# EAGLE board sch_smd_1206_component_only_component - Copy (EAGLE 8.4.1)

Size 100 x 80 mm. Coordinates in mm from the lower left corner, seen from the top.
Outline: 0,0 100,0 100,80 0,80 0,0
Copper layers (1*16): Top 0.035mm / dielectric 1.5mm / Bottom 0.035mm
Design rules "default": minimum track width 6mil, minimum drill 0.35mm, track to track 6mil, track to pad 6mil, pad to pad 6mil, via to via 6mil, smd to smd 6mil, copper to edge 40mil, drill to drill 6mil, minimum pad ring 10mil, minimum via ring 8mil, stop-mask expansion 4mil, vias tented up to drill 0mil, thermal gap 10mil

## Footprints (pad centres in the part's own frame; a part is rotated, then mirrored left to right if it is on the bottom)
BATTERY = drill 1.016 long: + 9.525,-5.08; +@1 9.525,5.08; - -5.715,0
1X12 = drill 1.016 long: 1 -13.97,0; 2 -11.43,0; 3 -8.89,0; 4 -6.35,0; 5 -3.81,0; 6 -1.27,0; 7 1.27,0; 8 3.81,0; 9 6.35,0; 10 8.89,0; 11 11.43,0; 12 13.97,0
1X11 = drill 1.016 long: 1 -12.7,0; 2 -10.16,0; 3 -7.62,0; 4 -5.08,0; 5 -2.54,0; 6 0,0; 7 2.54,0; 8 5.08,0; 9 7.62,0; 10 10.16,0; 11 12.7,0
JP2 = drill 0.914 long: 1 -2.54,0; 2 0,0; 3 2.54,0
LED_1206 = smd 1.6 x 1.803: A -1.422,0; C 1.422,0
R1206 = smd 1.6 x 1.803: 1 -1.422,0; 2 1.422,0
B3F-10XX = drill 1.016 long: 1 -3.251,2.261; 2 3.251,2.261; 3 -3.251,-2.261; 4 3.251,-2.261
SMD_PAD_VERSION = smd 4 x 0.8: P$01 0,15.2; P$02 0,14.1; P$03 0,13; P$04 0,11.9; P$05 0,10.8; P$06 0,9.7; P$07 0,8.6; P$08 0,7.5; P$09 0,6.4; P$10 0,5.3; P$11 0,4.2; P$12 0,3.1; P$25 17,3.1; P$26 17,4.2; P$27 17,5.3; P$28 17,6.4; P$29 17,7.5; P$30 17,8.6; P$31 17,9.7; P$32 17,10.8; P$33 17,11.9; P$34 17,13; P$35 17,14.1; P$36 17,15.2 | smd 0.8 x 2.4: P$13 2.45,0; P$14 3.55,0; P$15 4.65,0; P$16 5.75,0; P$17 6.85,0; P$18 7.95,0; P$19 9.05,0; P$20 10.15,0; P$21 11.25,0; P$22 12.35,0; P$23 13.45,0; P$24 14.55,0

## Placement (x,y rotation side)
BAT1  3.6V  [BATTERY]  59.69,21.59 180 top
JP1  [1X12]  39.37,55.88 90 top
JP2  [1X12]  74.93,55.88 270 top
JP3  [1X11]  58.42,41.91 180 top
JP4  [JP2]  43.18,38.1 180 top
LED1  RED  [LED_1206]  33.02,67.31 0 top
LED2  GREEN  [LED_1206]  33.02,64.77 0 top
LED3  W  [LED_1206]  33.02,62.23 0 top
LED4  Y  [LED_1206]  33.02,59.69 0 top
R1  1000  [R1206]  25.4,67.31 0 top
R2  1k  [R1206]  25.4,64.77 0 top
R3  1k  [R1206]  25.4,62.23 0 top
R4  1k  [R1206]  25.4,59.69 0 top
S1  [B3F-10XX]  26.67,52.07 90 top
U$1  HZX_MODULE  [SMD_PAD_VERSION]  48.26,46.99 0 top

## Library data of the parts
BAT1 = special
JP1 = pinhead; SPICEPREFIX: X
JP2 JP3 = pinhead
JP4 = jumper
LED1-LED4 = eagle-ltspice; SPICEMODEL: NONE; SPICEPREFIX: D; SPICETYPE: diode
R1-R4 = eagle-ltspice; SPICEMODEL: NONE; SPICEPREFIX: R
S1 = switch-omron; MPN: B3F-1000; OC_FARNELL: 176432; OC_NEWARK: 36M3542
U$1 = HZX_MODULE; AUTHOR: Agam

## Nets
+: BAT1.+@1
N$1: JP4.2 U$1.P$12
N$3: JP1.3 U$1.P$10
N$4: JP1.4 U$1.P$09
N$5: JP1.5 S1.4 U$1.P$08
N$6: JP1.6 U$1.P$07
N$7: JP1.7 U$1.P$06
N$8: JP1.8 LED4.A U$1.P$05
N$9: JP1.9 LED3.A U$1.P$04
N$10: JP1.10 LED2.A U$1.P$03
N$11: JP1.11 LED1.A U$1.P$02
N$12: JP1.1 JP4.3
N$13: JP2.1 U$1.P$36
N$14: JP2.2 U$1.P$35
N$15: JP2.3 U$1.P$34
N$16: JP2.4 U$1.P$33
N$17: JP2.5 U$1.P$32
N$18: JP2.6 U$1.P$31
N$19: JP2.7 U$1.P$30
N$20: JP2.8 U$1.P$29
N$21: JP2.9 U$1.P$28
N$22: JP2.10 U$1.P$27
N$23: JP2.11 U$1.P$26
N$24: JP2.12 U$1.P$25
N$25: JP3.1 U$1.P$24
N$26: JP3.2 U$1.P$23
N$27: JP3.3 U$1.P$22
N$28: JP3.4 U$1.P$21
N$29: JP3.5 U$1.P$20
N$30: JP3.6 U$1.P$19
N$31: JP3.7 U$1.P$18
N$32: JP3.8 U$1.P$17
N$33: JP3.9 U$1.P$16
N$34: JP3.10 U$1.P$15
N$35: JP3.11 U$1.P$14
N$37: BAT1.- JP1.2 S1.1 U$1.P$11
N$38: BAT1.+ JP4.1
N$39: LED1.C R1.2
N$40: LED2.C R2.2
N$41: LED3.C R3.2
N$42: LED4.C R4.2
N$44: JP1.12 R1.1 R2.1 R3.1 R4.1 S1.2 U$1.P$01

## Tracks (layer width: path | path; a pad name or v marks a point on that pad's centre or on a via)
N$1  (1 unrouted)
N$3  (1 unrouted)
N$4  (1 unrouted)
N$5  (2 unrouted)
N$6  (1 unrouted)
N$7  (1 unrouted)
N$8  (2 unrouted)
N$9  (2 unrouted)
N$10  (2 unrouted)
N$11  (2 unrouted)
N$12  (1 unrouted)
N$13  (1 unrouted)
N$14  (1 unrouted)
N$15  (1 unrouted)
N$16  (1 unrouted)
N$17  (1 unrouted)
N$18  (1 unrouted)
N$19  (1 unrouted)
N$20  (1 unrouted)
N$21  (1 unrouted)
N$22  (1 unrouted)
N$23  (1 unrouted)
N$24  (1 unrouted)
N$25  (1 unrouted)
N$26  (1 unrouted)
N$27  (1 unrouted)
N$28  (1 unrouted)
N$29  (1 unrouted)
N$30  (1 unrouted)
N$31  (1 unrouted)
N$32  (1 unrouted)
N$33  (1 unrouted)
N$34  (1 unrouted)
N$35  (1 unrouted)
N$37  (3 unrouted)
N$38  (1 unrouted)
N$39  (1 unrouted)
N$40  (1 unrouted)
N$41  (1 unrouted)
N$42  (1 unrouted)
N$44  (6 unrouted)